# Altium PCB clock_led.PcbDoc
Units mm, origin at the board's own origin, x right, y up, seen from the top; angles counter-clockwise.
Board outline 80 x 41 mm, 2 copper layers (Top Layer, Bottom Layer); 150 components, 131 nets, 574 pads, 149 vias.
Unrouted connection lines stored in the file: 167.
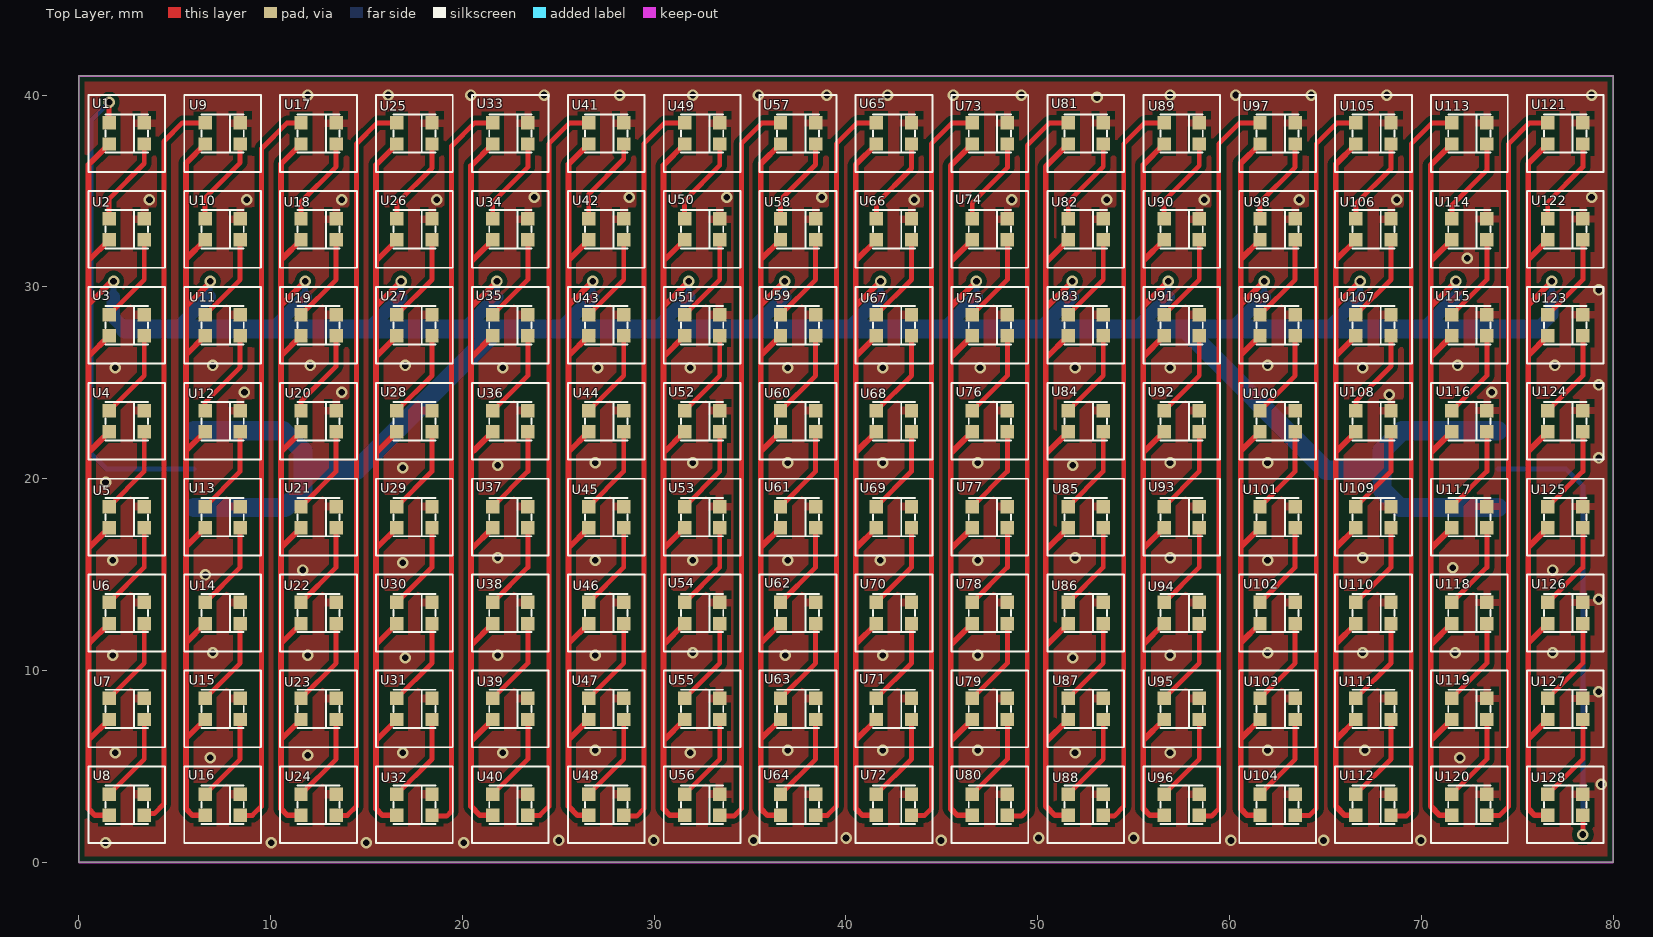
[diagram p0: Top Layer view]
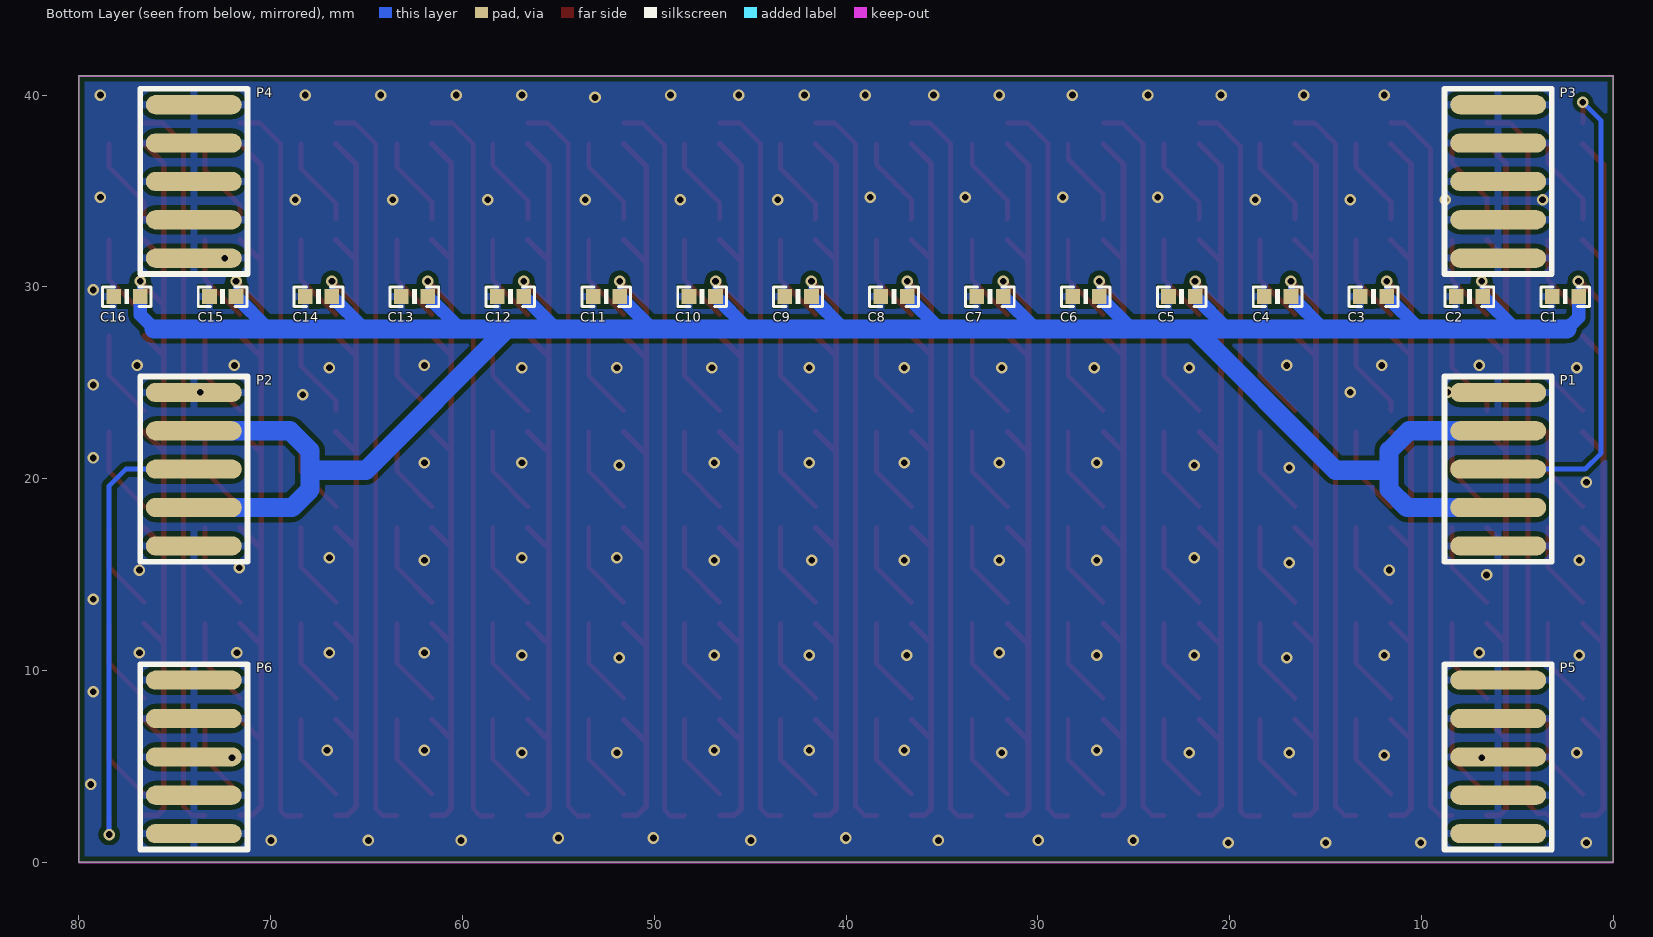
[diagram p1: Bottom Layer view, seen from below]

## Layer stack, top to bottom
Top Solder: solder mask 0.0102, Solder Resist, Dk 3.5
Top Layer: signal copper 0.0356
Dielectric 1: dielectric 0.32, FR-4, Dk 4.8
Bottom Layer: signal copper 0.0356
Bottom Solder: solder mask 0.0102, Solder Resist, Dk 3.5

## Board outline
0,0 80,0 80,41 0,41

## Design rules (kind name [scope] priority, off if disabled: settings)
Clearance [All] p1: gap=0.254 ignorepadtopadclearanceinfootprint=FALSE except(0: Arc-Hole Track-Hole SMDPad-Hole THPad-Hole Via-Hole Fill-Hole Poly-Hole Region-Hole Text-Hole)
PolygonConnect [All] p1: thpad.connectstyle=Direct thpad.reliefconductorwidth=0.5 thpad.reliefentries=4 thpad.polygonreliefangle="90 Angle" thpad.airgapwidth=0.254 smdpad.connectstyle=Relief smdpad.reliefconductorwidth=0.4 smdpad.reliefentries=4 smdpad.polygonreliefangle="90 Angle" smdpad.airgapwidth=0.254 via.connectstyle=Direct via.reliefconductorwidth=0.5 via.reliefentries=4 via.polygonreliefangle="90 Angle" via.airgapwidth=0.254
RoutingVias [All] p1: holewidth=0.711 width=1.27 viastyle="Through Hole" minholewidth=0.711 minwidth=1.27 maxholewidth=0.711 maxwidth=1.27
SilkToSilkClearance [All] p1: silktosilkclearance=0.1
SilkToSolderMaskClearance [IsPad] p1: minsilkscreentomaskgap=0.1 clearancetoexposedcopper=TRUE
SolderMaskExpansion [All] p1: expansion=0.102
Width [All] p1: maxlimit=1 minlimit=0.1 preferedwidth=0.254 minimp=50.000000 maximp=50.000000 favimp=50.000000
28 further rules are at their usual default settings.

## Components (designator, comment, footprint, x,y, rotation, side; value= is the part's Value field where it differs from the comment)
C1 "104" 0603P 2.5,29.5 r180 bottom
C2 "104" 0603P 7.5,29.5 r180 bottom
C3 "104" 0603P 12.5,29.5 r180 bottom
C4 "104" 0603P 17.5,29.5 r180 bottom
C5 "104" 0603P 22.5,29.5 r180 bottom
C6 "104" 0603P 27.5,29.5 r180 bottom
C7 "104" 0603P 32.5,29.5 r180 bottom
C8 "104" 0603P 37.5,29.5 r180 bottom
C9 "104" 0603P 42.5,29.5 r180 bottom
C10 "104" 0603P 47.5,29.5 r180 bottom
C11 "104" 0603P 52.5,29.5 r180 bottom
C12 "104" 0603P 57.5,29.5 r180 bottom
C13 "104" 0603P 62.5,29.5 r180 bottom
C14 "104" 0603P 67.5,29.5 r180 bottom
C15 "104" 0603P 72.5,29.5 r180 bottom
C16 "104" 0603P 77.5,29.5 r180 bottom
P1 "header5" header5 6,20.5 r180 bottom
P2 "header5" header5 74,20.5 r180 bottom
P3 "header5" header5 6,35.5 r180 bottom
P4 "header5" header5 74,35.5 r180 bottom
P5 "header5" header5 6,5.5 r180 bottom
P6 "header5" header5 74,5.5 r180 bottom
U1 "ws2812b-m" WS2812B-MINI 2.5,38 r0 top
U2 "ws2812b-m" WS2812B-MINI 2.5,33 r0 top
U3 "ws2812b-m" WS2812B-MINI 2.5,28 r0 top
U4 "ws2812b-m" WS2812B-MINI 2.5,23 r0 top
U5 "ws2812b-m" WS2812B-MINI 2.5,18 r0 top
U6 "ws2812b-m" WS2812B-MINI 2.5,13 r0 top
U7 "ws2812b-m" WS2812B-MINI 2.5,8 r0 top
U8 "ws2812b-m" WS2812B-MINI 2.5,3 r0 top
U9 "ws2812b-m" WS2812B-MINI 7.5,38 r0 top
U10 "ws2812b-m" WS2812B-MINI 7.5,33 r0 top
U11 "ws2812b-m" WS2812B-MINI 7.5,28 r0 top
U12 "ws2812b-m" WS2812B-MINI 7.5,23 r0 top
U13 "ws2812b-m" WS2812B-MINI 7.5,18 r0 top
U14 "ws2812b-m" WS2812B-MINI 7.5,13 r0 top
U15 "ws2812b-m" WS2812B-MINI 7.5,8 r0 top
U16 "ws2812b-m" WS2812B-MINI 7.5,3 r0 top
U17 "ws2812b-m" WS2812B-MINI 12.5,38 r0 top
U18 "ws2812b-m" WS2812B-MINI 12.5,33 r0 top
U19 "ws2812b-m" WS2812B-MINI 12.5,28 r0 top
U20 "ws2812b-m" WS2812B-MINI 12.5,23 r0 top
U21 "ws2812b-m" WS2812B-MINI 12.5,18 r0 top
U22 "ws2812b-m" WS2812B-MINI 12.5,13 r0 top
U23 "ws2812b-m" WS2812B-MINI 12.5,8 r0 top
U24 "ws2812b-m" WS2812B-MINI 12.5,3 r0 top
U25 "ws2812b-m" WS2812B-MINI 17.5,38 r0 top
U26 "ws2812b-m" WS2812B-MINI 17.5,33 r0 top
U27 "ws2812b-m" WS2812B-MINI 17.5,28 r0 top
U28 "ws2812b-m" WS2812B-MINI 17.5,23 r0 top
U29 "ws2812b-m" WS2812B-MINI 17.5,18 r0 top
U30 "ws2812b-m" WS2812B-MINI 17.5,13 r0 top
U31 "ws2812b-m" WS2812B-MINI 17.5,8 r0 top
U32 "ws2812b-m" WS2812B-MINI 17.5,3 r0 top
U33 "ws2812b-m" WS2812B-MINI 22.5,38 r0 top
U34 "ws2812b-m" WS2812B-MINI 22.5,33 r0 top
U35 "ws2812b-m" WS2812B-MINI 22.5,28 r0 top
U36 "ws2812b-m" WS2812B-MINI 22.5,23 r0 top
U37 "ws2812b-m" WS2812B-MINI 22.5,18 r0 top
U38 "ws2812b-m" WS2812B-MINI 22.5,13 r0 top
U39 "ws2812b-m" WS2812B-MINI 22.5,8 r0 top
U40 "ws2812b-m" WS2812B-MINI 22.5,3 r0 top
U41 "ws2812b-m" WS2812B-MINI 27.5,38 r0 top
U42 "ws2812b-m" WS2812B-MINI 27.5,33 r0 top
U43 "ws2812b-m" WS2812B-MINI 27.5,28 r0 top
U44 "ws2812b-m" WS2812B-MINI 27.5,23 r0 top
U45 "ws2812b-m" WS2812B-MINI 27.5,18 r0 top
U46 "ws2812b-m" WS2812B-MINI 27.5,13 r0 top
U47 "ws2812b-m" WS2812B-MINI 27.5,8 r0 top
U48 "ws2812b-m" WS2812B-MINI 27.5,3 r0 top
U49 "ws2812b-m" WS2812B-MINI 32.5,38 r0 top
U50 "ws2812b-m" WS2812B-MINI 32.5,33 r0 top
U51 "ws2812b-m" WS2812B-MINI 32.5,28 r0 top
U52 "ws2812b-m" WS2812B-MINI 32.5,23 r0 top
U53 "ws2812b-m" WS2812B-MINI 32.5,18 r0 top
U54 "ws2812b-m" WS2812B-MINI 32.5,13 r0 top
U55 "ws2812b-m" WS2812B-MINI 32.5,8 r0 top
U56 "ws2812b-m" WS2812B-MINI 32.5,3 r0 top
U57 "ws2812b-m" WS2812B-MINI 37.5,38 r0 top
U58 "ws2812b-m" WS2812B-MINI 37.5,33 r0 top
U59 "ws2812b-m" WS2812B-MINI 37.5,28 r0 top
U60 "ws2812b-m" WS2812B-MINI 37.5,23 r0 top
U61 "ws2812b-m" WS2812B-MINI 37.5,18 r0 top
U62 "ws2812b-m" WS2812B-MINI 37.5,13 r0 top
U63 "ws2812b-m" WS2812B-MINI 37.5,8 r0 top
U64 "ws2812b-m" WS2812B-MINI 37.5,3 r0 top
U65 "ws2812b-m" WS2812B-MINI 42.5,38 r0 top
U66 "ws2812b-m" WS2812B-MINI 42.5,33 r0 top
U67 "ws2812b-m" WS2812B-MINI 42.5,28 r0 top
U68 "ws2812b-m" WS2812B-MINI 42.5,23 r0 top
U69 "ws2812b-m" WS2812B-MINI 42.5,18 r0 top
U70 "ws2812b-m" WS2812B-MINI 42.5,13 r0 top
U71 "ws2812b-m" WS2812B-MINI 42.5,8 r0 top
U72 "ws2812b-m" WS2812B-MINI 42.5,3 r0 top
U73 "ws2812b-m" WS2812B-MINI 47.5,38 r0 top
U74 "ws2812b-m" WS2812B-MINI 47.5,33 r0 top
U75 "ws2812b-m" WS2812B-MINI 47.5,28 r0 top
U76 "ws2812b-m" WS2812B-MINI 47.5,23 r0 top
U77 "ws2812b-m" WS2812B-MINI 47.5,18 r0 top
U78 "ws2812b-m" WS2812B-MINI 47.5,13 r0 top
U79 "ws2812b-m" WS2812B-MINI 47.5,8 r0 top
U80 "ws2812b-m" WS2812B-MINI 47.5,3 r0 top
U81 "ws2812b-m" WS2812B-MINI 52.5,38 r0 top
U82 "ws2812b-m" WS2812B-MINI 52.5,33 r0 top
U83 "ws2812b-m" WS2812B-MINI 52.5,28 r0 top
U84 "ws2812b-m" WS2812B-MINI 52.5,23 r0 top
U85 "ws2812b-m" WS2812B-MINI 52.5,18 r0 top
U86 "ws2812b-m" WS2812B-MINI 52.5,13 r0 top
U87 "ws2812b-m" WS2812B-MINI 52.5,8 r0 top
U88 "ws2812b-m" WS2812B-MINI 52.5,3 r0 top
U89 "ws2812b-m" WS2812B-MINI 57.5,38 r0 top
U90 "ws2812b-m" WS2812B-MINI 57.5,33 r0 top
U91 "ws2812b-m" WS2812B-MINI 57.5,28 r0 top
U92 "ws2812b-m" WS2812B-MINI 57.5,23 r0 top
U93 "ws2812b-m" WS2812B-MINI 57.5,18 r0 top
U94 "ws2812b-m" WS2812B-MINI 57.5,13 r0 top
U95 "ws2812b-m" WS2812B-MINI 57.5,8 r0 top
U96 "ws2812b-m" WS2812B-MINI 57.5,3 r0 top
U97 "ws2812b-m" WS2812B-MINI 62.5,38 r0 top
U98 "ws2812b-m" WS2812B-MINI 62.5,33 r0 top
U99 "ws2812b-m" WS2812B-MINI 62.5,28 r0 top
U100 "ws2812b-m" WS2812B-MINI 62.5,23 r0 top
U101 "ws2812b-m" WS2812B-MINI 62.5,18 r0 top
U102 "ws2812b-m" WS2812B-MINI 62.5,13 r0 top
U103 "ws2812b-m" WS2812B-MINI 62.5,8 r0 top
U104 "ws2812b-m" WS2812B-MINI 62.5,3 r0 top
U105 "ws2812b-m" WS2812B-MINI 67.5,38 r0 top
U106 "ws2812b-m" WS2812B-MINI 67.5,33 r0 top
U107 "ws2812b-m" WS2812B-MINI 67.5,28 r0 top
U108 "ws2812b-m" WS2812B-MINI 67.5,23 r0 top
U109 "ws2812b-m" WS2812B-MINI 67.5,18 r0 top
U110 "ws2812b-m" WS2812B-MINI 67.5,13 r0 top
U111 "ws2812b-m" WS2812B-MINI 67.5,8 r0 top
U112 "ws2812b-m" WS2812B-MINI 67.5,3 r0 top
U113 "ws2812b-m" WS2812B-MINI 72.5,38 r0 top
U114 "ws2812b-m" WS2812B-MINI 72.5,33 r0 top
U115 "ws2812b-m" WS2812B-MINI 72.5,28 r0 top
U116 "ws2812b-m" WS2812B-MINI 72.5,23 r0 top
U117 "ws2812b-m" WS2812B-MINI 72.5,18 r0 top
U118 "ws2812b-m" WS2812B-MINI 72.5,13 r0 top
U119 "ws2812b-m" WS2812B-MINI 72.5,8 r0 top
U120 "ws2812b-m" WS2812B-MINI 72.5,3 r0 top
U121 "ws2812b-m" WS2812B-MINI 77.5,38 r0 top
U122 "ws2812b-m" WS2812B-MINI 77.5,33 r0 top
U123 "ws2812b-m" WS2812B-MINI 77.5,28 r0 top
U124 "ws2812b-m" WS2812B-MINI 77.5,23 r0 top
U125 "ws2812b-m" WS2812B-MINI 77.5,18 r0 top
U126 "ws2812b-m" WS2812B-MINI 77.5,13 r0 top
U127 "ws2812b-m" WS2812B-MINI 77.5,8 r0 top
U128 "ws2812b-m" WS2812B-MINI 77.5,3 r0 top

## Footprints (in the part's own frame and the unit in brackets; to place one, negate y for a bottom-side part, rotate by r counter-clockwise, add the part's x,y. Pads: shape width x height; smd on the part's side, far side on the other; paste and mask are expansions set on the pad)
0603P [mil]
  rect 30x30 smd: 1(-27,0) 2(27.5,-0.06)
  silkscreen extent -50,-20 50,20
header5 [mm]
  oval 5x1 smd: 1(0,4) 2(0,2) 3(0,0) 4(0,-2) 5(0,-4)
  silkscreen extent -2.79,-4.83 2.79,4.83
WS2812B-MINI [mm]
  rect 0.7x0.7 smd: 1(0.915,-0.55) 2(0.915,0.55) 3(-0.915,0.55) 4(-0.915,-0.55)
  silkscreen extent -2,-2 2,2

## Part data
C1 C2 C3 C4 C5 C6 C7 C8 C9 C10 C11 C12 C13 C14 C15 C16: library part C
U1 U2 U3 U4 U5 U6 U7 U8 U9 U10 U11 U12 U13 U14 U15 U16 U17 U18 U19 U20 U21 U22 U23 U24 U25 U26 U27 U28 U29 U30 U31 U32 U33 U34 U35 U36 U37 U38 U39 U40 U41 U42 U43 U44 U45 U46 U47 U48 U49 U50 U51 U52 U53 U54 U55 U56 U57 U58 U59 U60 U61 U62 U63 U64 U65 U66 U67 U68 U69 U70 U71 U72 U73 U74 U75 U76 U77 U78 U79 U80 U81 U82 U83 U84 U85 U86 U87 U88 U89 U90 U91 U92 U93 U94 U95 U96 U97 U98 U99 U100 U101 U102 U103 U104 U105 U106 U107 U108 U109 U110 U111 U112 U113 U114 U115 U116 U117 U118 U119 U120 U121 U122 U123 U124 U125 U126 U127 U128: library part WS2812B-MINI

## Via types
v1: diameter 0.6, hole 0.35, Top Layer to Bottom Layer, tented both sides, 149 vias

## Nets (pads, with @x,y where several pads share a name; then routed paths per layer and width w, separated by ;. In a path a pad name is that pad's centre, name@x,y a point inside that pad or via, vN(x,y) a via of type N, cw(c..) or ccw(c..) an arc to the next point about the centre after c; other vN are vias at no path point)
GND: C1.1 C2.1 C3.1 C4.1 C5.1 C6.1 C7.1 C8.1 C9.1 C10.1 C11.1 C12.1 C13.1 C14.1 C15.1 C16.1 P1.1 P1.5 P2.1 P2.5 P3.1 P3.2 P3.3 P3.4 P3.5 P4.1 P4.2 P4.3 P4.4 P4.5 P5.1 P5.2 P5.3 P5.4 P5.5 P6.1 P6.2 P6.3 P6.4 P6.5 U1.2 U2.2 U3.2 U4.2 U5.2 U6.2 U7.2 U8.2 U9.2 U10.2 U11.2 U12.2 U13.2 U14.2 U15.2 U16.2 U17.2 U18.2 U19.2 U20.2 U21.2 U22.2 U23.2 U24.2 U25.2 U26.2 U27.2 U28.2 U29.2 U30.2 U31.2 U32.2 U33.2 U34.2 U35.2 U36.2 U37.2 U38.2 U39.2 U40.2 U41.2 U42.2 U43.2 U44.2 U45.2 U46.2 U47.2 U48.2 U49.2 U50.2 U51.2 U52.2 U53.2 U54.2 U55.2 U56.2 U57.2 U58.2 U59.2 U60.2 U61.2 U62.2 U63.2 U64.2 U65.2 U66.2 U67.2 U68.2 U69.2 U70.2 U71.2 U72.2 U73.2 U74.2 U75.2 U76.2 U77.2 U78.2 U79.2 U80.2 U81.2 U82.2 U83.2 U84.2 U85.2 U86.2 U87.2 U88.2 U89.2 U90.2 U91.2 U92.2 U93.2 U94.2 U95.2 U96.2 U97.2 U98.2 U99.2 U100.2 U101.2 U102.2 U103.2 U104.2 U105.2 U106.2 U107.2 U108.2 U109.2 U110.2 U111.2 U112.2 U113.2 U114.2 U115.2 U116.2 U117.2 U118.2 U119.2 U120.2 U121.2 U122.2 U123.2 U124.2 U125.2 U126.2 U127.2 U128.2
  other v1: 1.397,1.016 10.033,1.016 14.986,1.016 20.066,1.016 25.019,1.143 29.972,1.143 35.179,1.143 44.958,1.143 60.071,1.143 64.897,1.143 69.977,1.143 40.005,1.27 50.038,1.27 54.991,1.27 79.375,4.064 6.858,5.461 72.009,5.461 11.938,5.588 1.905,5.715 16.891,5.715 22.098,5.715 31.877,5.715 51.943,5.715 56.896,5.715 26.924,5.842 36.957,5.842 41.91,5.842 46.863,5.842 61.976,5.842 67.056,5.842 79.248,8.89 17.018,10.668 51.816,10.668 1.778,10.795 11.938,10.795 21.844,10.795 26.924,10.795 36.83,10.795 41.91,10.795 46.863,10.795 56.896,10.795 6.985,10.922 32.004,10.922 61.976,10.922 66.929,10.922 71.755,10.922 76.835,10.922 79.248,13.716 6.604,14.986 11.684,15.24 76.835,15.24 71.628,15.367 16.891,15.621 1.778,15.748 26.924,15.748 32.004,15.748 36.957,15.748 41.783,15.748 46.863,15.748 61.976,15.748 21.844,15.875 51.943,15.875 56.896,15.875 66.929,15.875 1.397,19.812 16.891,20.574 21.844,20.701 51.816,20.701 26.924,20.828 32.004,20.828 36.957,20.828 41.91,20.828 46.863,20.828 56.896,20.828 61.976,20.828 79.248,21.082 68.326,24.384 8.636,24.511 13.716,24.511 73.66,24.511 79.248,24.892 1.905,25.781 22.098,25.781 27.051,25.781 31.877,25.781 36.957,25.781 41.91,25.781 46.99,25.781 51.943,25.781 56.896,25.781 66.929,25.781 6.985,25.908 12.065,25.908 17.018,25.908 61.976,25.908 71.882,25.908 76.962,25.908 79.248,29.845 72.39,31.496 3.683,34.544 8.763,34.544 13.716,34.544 18.669,34.544 43.561,34.544 48.641,34.544 53.594,34.544 58.674,34.544 63.627,34.544 68.707,34.544 23.749,34.671 28.702,34.671 33.782,34.671 38.735,34.671 78.867,34.671 53.086,39.878 11.938,40.005 16.129,40.005 20.447,40.005 24.257,40.005 28.194,40.005 32.004,40.005 35.433,40.005 38.989,40.005 42.164,40.005 45.593,40.005 49.149,40.005 56.896,40.005 60.325,40.005 64.262,40.005 68.199,40.005 78.867,40.005
NetP1_3: P1.3 U1.3 | length 25.5
  Top Layer w0.254: U1.3 v1(1.585,39.624)
  Bottom Layer w0.254: v1@1.585,39.558 v1(1.585,39.624) 0.635,38.674 0.635,21.336 1.471,20.5 P1.3
NetP2_3: P2.3 U128.1 | length 24
  Top Layer w0.254: v1(78.415,1.45) U128.1
  Bottom Layer w0.254: P2.3 77.544,20.5 78.415,19.629 v1(78.415,1.45)
NetU1_1: U1.1 U2.3 | length 4.7
  Top Layer w0.254: U2.3 1.585,34.605 3.415,36.435 U1.1
NetU2_1: U2.1 U3.3 | length 4.7
  Top Layer w0.254: U3.3 3.415,30.38 U2.1
NetU3_1: U3.1 U4.3 | length 4.7
  Top Layer w0.254: U4.3 3.415,25.38 U3.1
NetU4_1: U4.1 U5.3 | length 4.7
  Top Layer w0.254: U5.3 3.415,20.38 U4.1
NetU5_1: U5.1 U6.3 | length 4.7
  Top Layer w0.254: U6.3 3.415,15.38 U5.1
NetU6_1: U6.1 U7.3 | length 4.7
  Top Layer w0.254: U7.3 3.415,10.38 U6.1
NetU7_1: U7.1 U8.3 | length 4.7
  Top Layer w0.254: U8.3 3.415,5.38 U7.1
NetU8_1: U8.1 U9.3 | length 38.4
  Top Layer w0.254: U8.1 3.505,2.54 3.937,2.54 4.445,3.048 4.445,37.592 5.403,38.55 U9.3
NetU9_1: U9.1 U10.3 | length 4.7
  Top Layer w0.254: U10.3 6.585,34.652 8.415,36.482 U9.1
NetU10_1: U10.1 U11.3 | length 4.7
  Top Layer w0.254: U11.3 8.415,30.38 U10.1
NetU11_1: U11.1 U12.3 | length 4.7
  Top Layer w0.254: U12.3 6.585,23.984 8.415,25.814 U11.1
NetU12_1: U12.1 U13.3 | length 4.7
  Top Layer w0.254: U13.3 8.415,20.38 U12.1
NetU13_1: U13.1 U14.3 | length 4.7
  Top Layer w0.254: U14.3 8.415,15.38 U13.1
NetU14_1: U14.1 U15.3 | length 4.7
  Top Layer w0.254: U15.3 8.415,10.38 U14.1
NetU15_1: U15.1 U16.3 | length 4.7
  Top Layer w0.254: U16.3 8.415,5.38 U15.1
NetU16_1: U16.1 U17.3 | length 38.2
  Top Layer w0.254: U16.1 9.054,2.45 9.525,2.921 9.525,37.211 10.864,38.55 U17.3
NetU17_1: U17.1 U18.3 | length 4.7
  Top Layer w0.254: U18.3 11.585,34.445 13.415,36.275 U17.1
NetU18_1: U18.1 U19.3 | length 4.7
  Top Layer w0.254: U19.3 13.415,30.38 U18.1
NetU19_1: U19.1 U20.3 | length 4.7
  Top Layer w0.254: U20.3 11.585,24.031 13.415,25.861 U19.1
NetU20_1: U20.1 U21.3 | length 4.7
  Top Layer w0.254: U21.3 13.415,20.38 U20.1
NetU21_1: U21.1 U22.3 | length 4.7
  Top Layer w0.254: U22.3 13.415,15.38 U21.1
NetU22_1: U22.1 U23.3 | length 4.7
  Top Layer w0.254: U23.3 13.415,10.38 U22.1
NetU23_1: U23.1 U24.3 | length 4.7
  Top Layer w0.254: U24.3 13.415,5.38 U23.1
NetU24_1: U24.1 U25.3 | length 38.4
  Top Layer w0.254: U24.1 14.007,2.45 14.478,2.921 14.478,37.465 15.563,38.55 U25.3
NetU25_1: U25.1 U26.3 | length 4.7
  Top Layer w0.254: U26.3 16.585,34.365 18.415,36.195 U25.1
NetU26_1: U26.1 U27.3 | length 4.7
  Top Layer w0.254: U27.3 18.415,30.38 U26.1
NetU27_1: U27.1 U28.3 | length 4.7
  Top Layer w0.254: U28.3 18.415,25.38 U27.1
NetU28_1: U28.1 U29.3 | length 4.7
  Top Layer w0.254: U29.3 18.415,20.38 U28.1
NetU29_1: U29.1 U30.3 | length 4.7
  Top Layer w0.254: U30.3 18.415,15.38 U29.1
NetU30_1: U30.1 U31.3 | length 4.7
  Top Layer w0.254: U31.3 18.415,10.38 U30.1
NetU31_1: U31.1 U32.3 | length 4.7
  Top Layer w0.254: U32.3 18.415,5.38 U31.1
NetU32_1: U32.1 U33.3 | length 38.5
  Top Layer w0.254: U32.1 18.452,2.413 19.177,2.413 19.431,2.667 19.431,37.338 20.643,38.55 U33.3
NetU33_1: U33.1 U34.3 | length 4.7
  Top Layer w0.254: U34.3 21.585,34.412 23.415,36.242 U33.1
NetU34_1: U34.1 U35.3 | length 4.7
  Top Layer w0.254: U35.3 23.415,30.38 U34.1
NetU35_1: U35.1 U36.3 | length 4.7
  Top Layer w0.254: U36.3 23.415,25.38 U35.1
NetU36_1: U36.1 U37.3 | length 4.7
  Top Layer w0.254: U37.3 23.415,20.38 U36.1
NetU37_1: U37.1 U38.3 | length 4.7
  Top Layer w0.254: U38.3 23.415,15.38 U37.1
NetU38_1: U38.1 U39.3 | length 4.7
  Top Layer w0.254: U39.3 23.415,10.38 U38.1
NetU39_1: U39.1 U40.3 | length 4.7
  Top Layer w0.254: U40.3 23.415,5.38 U39.1
NetU40_1: U40.1 U41.3 | length 38.4
  Top Layer w0.254: U40.1 24.04,2.45 24.511,2.921 24.511,37.465 25.596,38.55 U41.3
NetU41_1: U41.1 U42.3 | length 4.7
  Top Layer w0.254: U42.3 26.585,34.84 28.415,36.67 U41.1
NetU42_1: U42.1 U43.3 | length 4.7
  Top Layer w0.254: U43.3 28.415,30.38 U42.1
NetU43_1: U43.1 U44.3 | length 4.7
  Top Layer w0.254: U44.3 28.415,25.38 U43.1
NetU44_1: U44.1 U45.3 | length 4.7
  Top Layer w0.254: U45.3 28.415,20.38 U44.1
NetU45_1: U45.1 U46.3 | length 4.7
  Top Layer w0.254: U46.3 28.415,15.38 U45.1
NetU46_1: U46.1 U47.3 | length 4.7
  Top Layer w0.254: U47.3 28.415,10.38 U46.1
NetU47_1: U47.1 U48.3 | length 4.7
  Top Layer w0.254: U48.3 28.415,5.38 U47.1
NetU48_1: U48.1 U49.3 | length 38.5
  Top Layer w0.254: U48.1 28.452,2.413 29.083,2.413 29.464,2.794 29.464,37.465 30.549,38.55 U49.3
NetU49_1: U49.1 U50.3 | length 4.7
  Top Layer w0.254: U50.3 31.585,34.506 33.415,36.336 U49.1
NetU50_1: U50.1 U51.3 | length 4.7
  Top Layer w0.254: U51.3 33.415,30.38 U50.1
NetU51_1: U51.1 U52.3 | length 4.7
  Top Layer w0.254: U52.3 33.415,25.38 U51.1
NetU52_1: U52.1 U53.3 | length 4.7
  Top Layer w0.254: U53.3 33.415,20.38 U52.1
NetU53_1: U53.1 U54.3 | length 4.7
  Top Layer w0.254: U54.3 33.415,15.38 U53.1
NetU54_1: U54.1 U55.3 | length 4.7
  Top Layer w0.254: U55.3 33.415,10.38 U54.1
NetU55_1: U55.1 U56.3 | length 4.7
  Top Layer w0.254: U56.3 33.415,5.38 U55.1
NetU56_1: U56.1 U57.3 | length 38.5
  Top Layer w0.254: U56.1 33.452,2.413 34.163,2.413 34.544,2.794 34.544,37.465 35.629,38.55 U57.3
NetU57_1: U57.1 U58.3 | length 4.7
  Top Layer w0.254: U58.3 36.585,34.553 38.415,36.383 U57.1
NetU58_1: U58.1 U59.3 | length 4.7
  Top Layer w0.254: U59.3 38.415,30.38 U58.1
NetU59_1: U59.1 U60.3 | length 4.7
  Top Layer w0.254: U60.3 38.415,25.38 U59.1
NetU60_1: U60.1 U61.3 | length 4.7
  Top Layer w0.254: U61.3 38.415,20.38 U60.1
NetU61_1: U61.1 U62.3 | length 4.7
  Top Layer w0.254: U62.3 38.415,15.38 U61.1
NetU62_1: U62.1 U63.3 | length 4.7
  Top Layer w0.254: U63.3 38.415,10.38 U62.1
NetU63_1: U63.1 U64.3 | length 4.7
  Top Layer w0.254: U64.3 38.415,5.38 U63.1
NetU64_1: U64.1 U65.3 | length 38.4
  Top Layer w0.254: U64.1 39.026,2.45 39.497,2.921 39.497,37.465 40.582,38.55 U65.3
NetU65_1: U65.1 U66.3 | length 4.7
  Top Layer w0.254: U66.3 41.585,34.346 43.415,36.176 U65.1
NetU66_1: U66.1 U67.3 | length 4.7
  Top Layer w0.254: U67.3 43.415,30.38 U66.1
NetU67_1: U67.1 U68.3 | length 4.7
  Top Layer w0.254: U68.3 43.415,25.38 U67.1
NetU68_1: U68.1 U69.3 | length 4.7
  Top Layer w0.254: U69.3 43.415,20.38 U68.1
NetU69_1: U69.1 U70.3 | length 4.7
  Top Layer w0.254: U70.3 43.415,15.38 U69.1
NetU70_1: U70.1 U71.3 | length 4.7
  Top Layer w0.254: U71.3 43.415,10.38 U70.1
NetU71_1: U71.1 U72.3 | length 4.7
  Top Layer w0.254: U72.3 43.415,5.38 U71.1
NetU72_1: U72.1 U73.3 | length 38.4
  Top Layer w0.254: U72.1 44.106,2.45 44.45,2.794 44.45,37.465 45.535,38.55 U73.3
NetU73_1: U73.1 U74.3 | length 4.7
  Top Layer w0.254: U74.3 46.585,34.393 48.415,36.223 U73.1
NetU74_1: U74.1 U75.3 | length 4.7
  Top Layer w0.254: U75.3 48.415,30.38 U74.1
NetU75_1: U75.1 U76.3 | length 4.7
  Top Layer w0.254: U76.3 48.415,25.38 U75.1
NetU76_1: U76.1 U77.3 | length 4.7
  Top Layer w0.254: U77.3 48.415,20.38 U76.1
NetU77_1: U77.1 U78.3 | length 4.7
  Top Layer w0.254: U78.3 48.415,15.38 U77.1
NetU78_1: U78.1 U79.3 | length 4.7
  Top Layer w0.254: U79.3 48.415,10.38 U78.1
NetU79_1: U79.1 U80.3 | length 4.7
  Top Layer w0.254: U80.3 48.415,5.38 U79.1
NetU80_1: U80.1 U81.3 | length 38.5
  Top Layer w0.254: U80.1 48.452,2.413 49.149,2.413 49.449,2.713 49.449,37.384 50.615,38.55 U81.3
NetU81_1: U81.1 U82.3 | length 4.7
  Top Layer w0.254: U82.3 51.585,34.44 53.415,36.27 U81.1
NetU82_1: U82.1 U83.3 | length 4.7
  Top Layer w0.254: U83.3 53.415,30.38 U82.1
NetU83_1: U83.1 U84.3 | length 4.7
  Top Layer w0.254: U84.3 53.415,25.38 U83.1
NetU84_1: U84.1 U85.3 | length 4.7
  Top Layer w0.254: U85.3 53.415,20.38 U84.1
NetU85_1: U85.1 U86.3 | length 4.7
  Top Layer w0.254: U86.3 53.415,15.38 U85.1
NetU86_1: U86.1 U87.3 | length 4.7
  Top Layer w0.254: U87.3 53.415,10.38 U86.1
NetU87_1: U87.1 U88.3 | length 4.7
  Top Layer w0.254: U88.3 53.415,5.38 U87.1
NetU88_1: U88.1 U89.3 | length 38.4
  Top Layer w0.254: U88.1 53.452,2.413 53.975,2.413 54.483,2.921 54.483,37.465 55.568,38.55 U89.3
NetU89_1: U89.1 U90.3 | length 4.7
  Top Layer w0.254: U90.3 56.585,34.487 58.415,36.317 U89.1
NetU90_1: U90.1 U91.3 | length 4.7
  Top Layer w0.254: U91.3 58.415,30.38 U90.1
NetU91_1: U91.1 U92.3 | length 4.7
  Top Layer w0.254: U92.3 58.415,25.38 U91.1
NetU92_1: U92.1 U93.3 | length 4.7
  Top Layer w0.254: U93.3 58.415,20.38 U92.1
NetU93_1: U93.1 U94.3 | length 4.7
  Top Layer w0.254: U94.3 58.415,15.38 U93.1
NetU94_1: U94.1 U95.3 | length 4.7
  Top Layer w0.254: U95.3 58.415,10.38 U94.1
NetU95_1: U95.1 U96.3 | length 4.7
  Top Layer w0.254: U96.3 58.415,5.38 U95.1
NetU96_1: U96.1 U97.3 | length 38.5
  Top Layer w0.254: U96.1 58.452,2.413 59.055,2.413 59.436,2.794 59.436,37.465 60.521,38.55 U97.3
NetU97_1: U97.1 U98.3 | length 4.7
  Top Layer w0.254: U98.3 61.585,34.407 63.415,36.237 U97.1
NetU98_1: U98.1 U99.3 | length 4.7
  Top Layer w0.254: U99.3 63.415,30.38 U98.1
NetU99_1: U99.1 U100.3 | length 4.7
  Top Layer w0.254: U100.3 63.415,25.38 U99.1
NetU100_1: U100.1 U101.3 | length 4.7
  Top Layer w0.254: U101.3 63.415,20.38 U100.1
NetU101_1: U101.1 U102.3 | length 4.7
  Top Layer w0.254: U102.3 63.415,15.38 U101.1
NetU102_1: U102.1 U103.3 | length 4.7
  Top Layer w0.254: U103.3 63.415,10.38 U102.1
NetU103_1: U103.1 U104.3 | length 4.7
  Top Layer w0.254: U104.3 63.415,5.38 U103.1
NetU104_1: U104.1 U105.3 | length 38.4
  Top Layer w0.254: U104.1 64.172,2.45 64.516,2.794 64.516,37.465 65.601,38.55 U105.3
NetU105_1: U105.1 U106.3 | length 4.7
  Top Layer w0.254: U106.3 66.585,34.327 68.415,36.157 U105.1
NetU106_1: U106.1 U107.3 | length 4.7
  Top Layer w0.254: U107.3 68.415,30.38 U106.1
NetU107_1: U107.1 U108.3 | length 4.7
  Top Layer w0.254: U108.3 66.585,24.04 68.415,25.87 U107.1
NetU108_1: U108.1 U109.3 | length 4.7
  Top Layer w0.254: U109.3 68.415,20.38 U108.1
NetU109_1: U109.1 U110.3 | length 4.7
  Top Layer w0.254: U110.3 68.415,15.38 U109.1
NetU110_1: U110.1 U111.3 | length 4.7
  Top Layer w0.254: U111.3 68.415,10.38 U110.1
NetU111_1: U111.1 U112.3 | length 4.7
  Top Layer w0.254: U112.3 68.415,5.38 U111.1
NetU112_1: U112.1 U113.3 | length 38.5
  Top Layer w0.254: U112.1 68.452,2.413 69.215,2.413 69.469,2.667 69.469,37.465 70.554,38.55 U113.3
NetU113_1: U113.1 U114.3 | length 4.7
  Top Layer w0.254: U114.3 71.585,34.247 73.415,36.077 U113.1
NetU114_1: U114.1 U115.3 | length 4.7
  Top Layer w0.254: U115.3 73.415,30.38 U114.1
NetU115_1: U115.1 U116.3 | length 4.7
  Top Layer w0.254: U116.3 73.415,25.38 U115.1
NetU116_1: U116.1 U117.3 | length 4.7
  Top Layer w0.254: U117.3 73.415,20.38 U116.1
NetU117_1: U117.1 U118.3 | length 4.7
  Top Layer w0.254: U118.3 73.415,15.38 U117.1
NetU118_1: U118.1 U119.3 | length 4.7
  Top Layer w0.254: U119.3 73.415,10.38 U118.1
NetU119_1: U119.1 U120.3 | length 4.7
  Top Layer w0.254: U120.3 73.415,5.38 U119.1
NetU120_1: U120.1 U121.3 | length 38.4
  Top Layer w0.254: U120.1 74.078,2.45 74.549,2.921 74.549,37.465 75.634,38.55 U121.3
NetU121_1: U121.1 U122.3 | length 4.7
  Top Layer w0.254: U122.3 76.585,34.421 78.415,36.251 U121.1
NetU122_1: U122.1 U123.3 | length 4.7
  Top Layer w0.254: U123.3 78.415,30.38 U122.1
NetU123_1: U123.1 U124.3 | length 4.7
  Top Layer w0.254: U124.3 78.415,25.38 U123.1
NetU124_1: U124.1 U125.3 | length 4.7
  Top Layer w0.254: U125.3 78.415,20.38 U124.1
NetU125_1: U125.1 U126.3 | length 4.7
  Top Layer w0.254: U126.3 78.415,15.38 U125.1
NetU126_1: U126.1 U127.3 | length 4.7
  Top Layer w0.254: U127.3 78.415,10.38 U126.1
NetU127_1: U127.1 U128.3 | length 4.7
  Top Layer w0.254: U128.3 78.415,5.38 U127.1
VCC: C1.2 C2.2 C3.2 C4.2 C5.2 C6.2 C7.2 C8.2 C9.2 C10.2 C11.2 C12.2 C13.2 C14.2 C15.2 C16.2 P1.2 P1.4 P2.2 P2.4 U1.4 U2.4 U3.4 U4.4 U5.4 U6.4 U7.4 U8.4 U9.4 U10.4 U11.4 U12.4 U13.4 U14.4 U15.4 U16.4 U17.4 U18.4 U19.4 U20.4 U21.4 U22.4 U23.4 U24.4 U25.4 U26.4 U27.4 U28.4 U29.4 U30.4 U31.4 U32.4 U33.4 U34.4 U35.4 U36.4 U37.4 U38.4 U39.4 U40.4 U41.4 U42.4 U43.4 U44.4 U45.4 U46.4 U47.4 U48.4 U49.4 U50.4 U51.4 U52.4 U53.4 U54.4 U55.4 U56.4 U57.4 U58.4 U59.4 U60.4 U61.4 U62.4 U63.4 U64.4 U65.4 U66.4 U67.4 U68.4 U69.4 U70.4 U71.4 U72.4 U73.4 U74.4 U75.4 U76.4 U77.4 U78.4 U79.4 U80.4 U81.4 U82.4 U83.4 U84.4 U85.4 U86.4 U87.4 U88.4 U89.4 U90.4 U91.4 U92.4 U93.4 U94.4 U95.4 U96.4 U97.4 U98.4 U99.4 U100.4 U101.4 U102.4 U103.4 U104.4 U105.4 U106.4 U107.4 U108.4 U109.4 U110.4 U111.4 U112.4 U113.4 U114.4 U115.4 U116.4 U117.4 U118.4 U119.4 U120.4 U121.4 U122.4 U123.4 U124.4 U125.4 U126.4 U127.4 U128.4 | length 934.6
  Top Layer w0.3: U8.4 0.852,2.45 0.508,2.794 0.508,6.373 ; U7.4 0.508,6.373 ; U6.4 0.565,11.43 0.508,11.43 ; U5.4 0.508,16.373 ; U4.4 0.598,21.463 0.508,21.463 ; U3.4 0.508,26.373 ; U2.4 0.508,31.373 ; U1.4 0.508,36.373 0.508,31.373 ; v1@1.725,30.3 0.508,29.083 ; U16.4 5.932,2.45 5.588,2.794 5.588,6.477 ; U15.4 5.612,6.477 5.588,6.477 ; U14.4 5.588,11.453 ; U13.4 5.588,16.453 ; U12.4 5.598,21.463 5.588,21.463 ; U11.4 5.588,26.453 ; U10.4 5.631,31.496 5.588,31.496 ; U9.4 5.588,36.453 5.588,31.496 ; v1(6.858,30.3) 6.858,30.245 5.588,28.975 ; U24.4 10.885,2.45 10.541,2.794 10.541,6.406 ; U23.4 10.541,6.406 ; U22.4 10.541,11.406 ; U21.4 10.541,16.406 ; U20.4 10.541,21.406 ; U19.4 10.541,26.406 ; U18.4 10.631,31.496 10.541,31.496 ; U17.4 10.541,36.406 10.541,31.496 ; v1(11.802,30.3) 10.541,29.039 ; U32.4 15.838,2.45 15.494,2.794 15.494,6.359 ; U31.4 15.494,6.359 ; U30.4 15.494,11.359 ; U29.4 15.518,16.383 15.494,16.383 ; U28.4 15.494,21.359 ; U27.4 15.494,26.359 ; U26.4 15.494,31.359 ; U25.4 15.494,36.359 15.494,31.359 ; v1(16.802,30.3) 15.494,28.992 ; U40.4 20.918,2.45 20.447,2.921 20.447,6.312 ; U39.4 20.447,6.312 ; U38.4 20.447,11.312 ; U37.4 20.447,16.312 ; U36.4 20.598,21.463 20.447,21.463 ; U35.4 20.447,26.312 ; U34.4 20.504,31.369 20.447,31.369 ; U33.4 20.447,36.312 20.447,31.369 ; v1(21.802,30.3) 20.447,28.945 ; U48.4 25.998,2.45 25.527,2.921 25.527,6.392 ; U47.4 25.527,6.392 ; U46.4 25.565,11.43 25.527,11.43 ; U45.4 25.527,16.392 ; U44.4 25.527,21.392 ; U43.4 25.527,26.392 ; U42.4 25.527,31.392 ; U41.4 25.527,36.392 25.527,31.392 ; v1(26.802,30.3) 25.527,29.025 ; U56.4 30.824,2.45 30.48,2.794 30.48,6.345 ; U55.4 30.48,6.345 ; U54.4 30.48,11.345 ; U53.4 30.48,16.345 ; U52.4 30.48,21.345 ; U51.4 30.48,26.345 ; U50.4 30.48,31.345 ; U49.4 30.48,36.345 30.48,31.345 ; v1(31.802,30.3) 30.48,28.978 ; U64.4 35.904,2.45 35.56,2.794 35.56,6.425 ; U63.4 35.56,6.425 ; U62.4 35.565,11.43 35.56,11.43 ; U61.4 35.56,16.425 ; U60.4 35.56,21.425 ; U59.4 35.56,26.425 ; U58.4 35.56,31.425 ; U57.4 35.56,36.425 35.56,31.425 ; v1(36.802,30.3) 35.56,29.058 ; U72.4 40.857,2.45 40.513,2.794 40.513,6.378 ; U71.4 40.513,6.378 ; U70.4 40.513,11.378 ; U69.4 40.513,16.378 ; U68.4 40.513,21.378 ; U67.4 40.513,26.378 ; U66.4 40.513,31.378 ; U65.4 40.513,36.378 40.513,31.378 ; v1(41.801,30.3) 40.513,29.012 ; U80.4 45.81,2.45 45.466,2.794 45.466,6.35 ; U79.4 45.485,6.35 45.466,6.35 ; U78.4 45.466,11.331 ; U77.4 45.466,16.331 ; U76.4 45.466,21.331 ; U75.4 45.466,26.331 ; U74.4 45.466,31.331 ; U73.4 45.466,36.331 45.466,31.331 ; v1(46.801,30.3) 45.466,28.965 ; U88.4 50.89,2.45 50.419,2.921 50.419,6.284 ; U87.4 50.419,6.284 ; U86.4 50.419,11.284 ; U85.4 50.419,16.284 ; U84.4 50.471,21.336 50.419,21.336 ; U83.4 50.424,26.289 50.419,26.289 ; U82.4 50.421,31.287 50.419,31.287 ; U81.4 50.419,36.284 50.419,31.287 ; v1(51.801,30.3) 50.419,28.918 ; U96.4 55.843,2.45 55.499,2.794 55.499,6.364 ; U95.4 55.499,6.364 ; U94.4 55.499,11.364 ; U93.4 55.499,16.364 ; U92.4 55.499,21.364 ; U91.4 55.499,26.364 ; U90.4 55.499,31.364 ; U89.4 55.499,36.364 55.499,31.364 ; v1(56.801,30.3) 55.499,28.998 ; U104.4 60.923,2.45 60.579,2.794 60.579,6.444 ; U103.4 60.579,6.444 ; U102.4 60.579,11.444 ; U101.4 60.579,16.444 ; U100.4 60.579,21.444 ; U99.4 60.579,26.444 ; U98.4 60.579,31.444 ; U97.4 60.579,36.444 60.579,31.444 ; v1(61.801,30.3) 60.579,29.078 ; U112.4 66.003,2.45 65.532,2.921 65.532,6.397 ; U111.4 65.532,6.397 ; U110.4 65.532,11.397 ; U109.4 65.532,16.397 ; U108.4 65.532,21.397 ; U107.4 65.551,26.416 65.532,26.416 ; U106.4 65.532,31.397 ; U105.4 65.532,36.397 65.532,31.397 ; v1(66.801,30.3) 65.532,29.031 ; U120.4 70.956,2.45 70.485,2.921 70.485,6.35 ; U119.4 70.485,6.35 ; U118.4 70.485,11.35 ; U117.4 70.485,16.35 ; U116.4 70.485,21.35 ; U115.4 70.485,26.35 ; U114.4 70.485,31.35 ; U113.4 70.485,36.35 70.485,31.35 ; v1(71.801,30.3) 70.485,28.984 ; U128.4 75.909,2.45 75.565,2.794 75.565,6.43 ; U127.4 75.565,6.43 ; U126.4 75.565,11.43 ; U125.4 75.565,16.43 ; U124.4 75.565,21.43 ; U123.4 75.565,26.43 ; U122.4 75.565,31.43 ; U121.4 75.565,36.43 75.565,31.43 ; v1(76.801,30.3) 75.565,29.064 ; 0.508,6.373 0.508,11.43 ; 0.508,11.43 0.508,16.373 ; 0.508,16.373 0.508,21.463 ; 0.508,21.463 0.508,26.373 ; 0.508,26.373 0.508,29.083 ; 0.508,29.083 0.508,31.373 ; 5.588,6.477 5.588,11.453 ; 5.588,11.453 5.588,16.453 ; 5.588,16.453 5.588,21.463 ; 5.588,21.463 5.588,26.453 ; 5.588,26.453 5.588,28.975 ; 5.588,28.975 5.588,31.496 ; 10.541,6.406 10.541,11.406 ; 10.541,11.406 10.541,16.406 ; 10.541,16.406 10.541,21.406 ; 10.541,21.406 10.541,26.406 ; 10.541,26.406 10.541,29.039 ; 10.541,29.039 10.541,31.496 ; 15.494,6.359 15.494,11.359 ; 15.494,11.359 15.494,16.383 ; 15.494,16.383 15.494,21.359 ; 15.494,21.359 15.494,26.359 ; 15.494,26.359 15.494,28.992 ; 15.494,28.992 15.494,31.359 ; 20.447,6.312 20.447,11.312 ; 20.447,11.312 20.447,16.312 ; 20.447,16.312 20.447,21.463 ; 20.447,21.463 20.447,26.312 ; 20.447,26.312 20.447,28.945 ; 20.447,28.945 20.447,31.369 ; 25.527,6.392 25.527,11.43 ; 25.527,11.43 25.527,16.392 ; 25.527,16.392 25.527,21.392 ; 25.527,21.392 25.527,26.392 ; 25.527,26.392 25.527,29.025 ; 25.527,29.025 25.527,31.392 ; 30.48,6.345 30.48,11.345 ; 30.48,11.345 30.48,16.345 ; 30.48,16.345 30.48,21.345 ; 30.48,21.345 30.48,26.345 ; 30.48,26.345 30.48,28.978 ; 30.48,28.978 30.48,31.345 ; 35.56,6.425 35.56,11.43 ; 35.56,11.43 35.56,16.425 ; 35.56,16.425 35.56,21.425 ; 35.56,21.425 35.56,26.425 ; 35.56,26.425 35.56,29.058 ; 35.56,29.058 35.56,31.425 ; 40.513,6.378 40.513,11.378 ; 40.513,11.378 40.513,16.378 ; 40.513,16.378 40.513,21.378 ; 40.513,21.378 40.513,26.378 ; 40.513,26.378 40.513,29.012 ; 40.513,29.012 40.513,31.378 ; 45.466,6.35 45.466,11.331 ; 45.466,11.331 45.466,16.331 ; 45.466,16.331 45.466,21.331 ; 45.466,21.331 45.466,26.331 ; 45.466,26.331 45.466,28.965 ; 45.466,28.965 45.466,31.331 ; 50.419,6.284 50.419,11.284 ; 50.419,11.284 50.419,16.284 ; 50.419,16.284 50.419,21.336 ; 50.419,21.336 50.419,26.289 ; 50.419,26.289 50.419,28.918 ; 50.419,28.918 50.419,31.287 ; 55.499,6.364 55.499,11.364 ; 55.499,11.364 55.499,16.364 ; 55.499,16.364 55.499,21.364 ; 55.499,21.364 55.499,26.364 ; 55.499,26.364 55.499,28.998 ; 55.499,28.998 55.499,31.364 ; 60.579,6.444 60.579,11.444 ; 60.579,11.444 60.579,16.444 ; 60.579,16.444 60.579,21.444 ; 60.579,21.444 60.579,26.444 ; 60.579,26.444 60.579,29.078 ; 60.579,29.078 60.579,31.444 ; 65.532,6.397 65.532,11.397 ; 65.532,11.397 65.532,16.397 ; 65.532,16.397 65.532,21.397 ; 65.532,21.397 65.532,26.416 ; 65.532,26.416 65.532,29.031 ; 65.532,29.031 65.532,31.397 ; 70.485,6.35 70.485,11.35 ; 70.485,11.35 70.485,16.35 ; 70.485,16.35 70.485,21.35 ; 70.485,21.35 70.485,26.35 ; 70.485,26.35 70.485,28.984 ; 70.485,28.984 70.485,31.35 ; 75.565,6.43 75.565,11.43 ; 75.565,11.43 75.565,16.43 ; 75.565,16.43 75.565,21.43 ; 75.565,21.43 75.565,26.43 ; 75.565,26.43 75.565,29.064 ; 75.565,29.064 75.565,31.43
  Bottom Layer w0.3: C1.2 1.808,29.505 1.808,30.294 v1(1.814,30.3) ; C2.2 6.83,29.527 6.83,30.272 v1(6.858,30.3) ; C3.2 v1(11.802,30.3) ; C4.2 v1(16.802,30.3) ; C5.2 v1(21.802,30.3) ; C6.2 v1(26.802,30.3) ; C7.2 v1(31.802,30.3) ; C8.2 v1(36.802,30.3) ; C9.2 v1(41.801,30.3) ; C10.2 v1(46.801,30.3) ; C11.2 v1(51.801,30.3) ; C12.2 v1(56.801,30.3) ; C13.2 v1(61.801,30.3) ; C14.2 v1(66.801,30.3) ; C15.2 v1(71.801,30.3) ; C16.2 v1(76.801,30.3)
  Bottom Layer w0.7: C1.2 1.802,28.424 2.413,27.813 ; 5.116,27.813 C2.2 ; 10.116,27.813 C3.2 ; 15.116,27.813 C4.2 ; 20.116,27.813 C5.2 ; 25.116,27.813 C6.2 ; 30.116,27.813 C7.2 ; 35.116,27.813 C8.2 ; 40.116,27.813 C9.2 ; 45.116,27.813 C10.2 ; 50.116,27.813 C11.2 ; 55.116,27.813 C12.2 ; 60.116,27.813 C13.2 ; 65.116,27.813 C14.2 ; 70.116,27.813 C15.2 ; 76.073,27.813 76.801,28.541 C16.2
  Bottom Layer w1: 2.413,27.813 5.116,27.813 10.116,27.813 15.116,27.813 20.116,27.813 21.844,27.813 14.478,20.447 11.684,20.447 ; P1.4 10.753,18.5 11.684,19.431 11.684,20.447 ; P1.2 10.647,22.5 11.684,21.463 11.684,20.447 ; 21.971,27.813 25.116,27.813 30.116,27.813 35.116,27.813 40.116,27.813 45.116,27.813 50.116,27.813 55.116,27.813 57.658,27.813 ; P2.4 68.876,18.5 67.945,19.431 67.945,20.447 ; P2.2 68.982,22.5 67.945,21.463 67.945,20.447 ; 76.073,27.813 70.116,27.813 65.116,27.813 60.116,27.813 57.658,27.813 ; 57.658,27.813 65.024,20.447 67.945,20.447

## Polygon pours and split planes (outlines as drawn)
GND on Bottom Layer (solid, remove dead copper, pour order 0): 0,0 0,41.021 80.01,41.021 80.01,0
GND on Top Layer (solid, pour order 2): 0,0 0,41.021 80.01,41.021 80.01,0

## Keep-outs
Keep-Out Layer:
  the board outline again, w0.1